# Altium PCB 外接陀螺仪模块(bmi160).PcbDoc
Units mil, origin at the board's own origin, x right, y up, seen from the top; angles counter-clockwise.
Board outline 1026 x 1289 mil, 2 copper layers (Top Layer, Bottom Layer); 41 components, 28 nets, 138 pads, 67 vias.
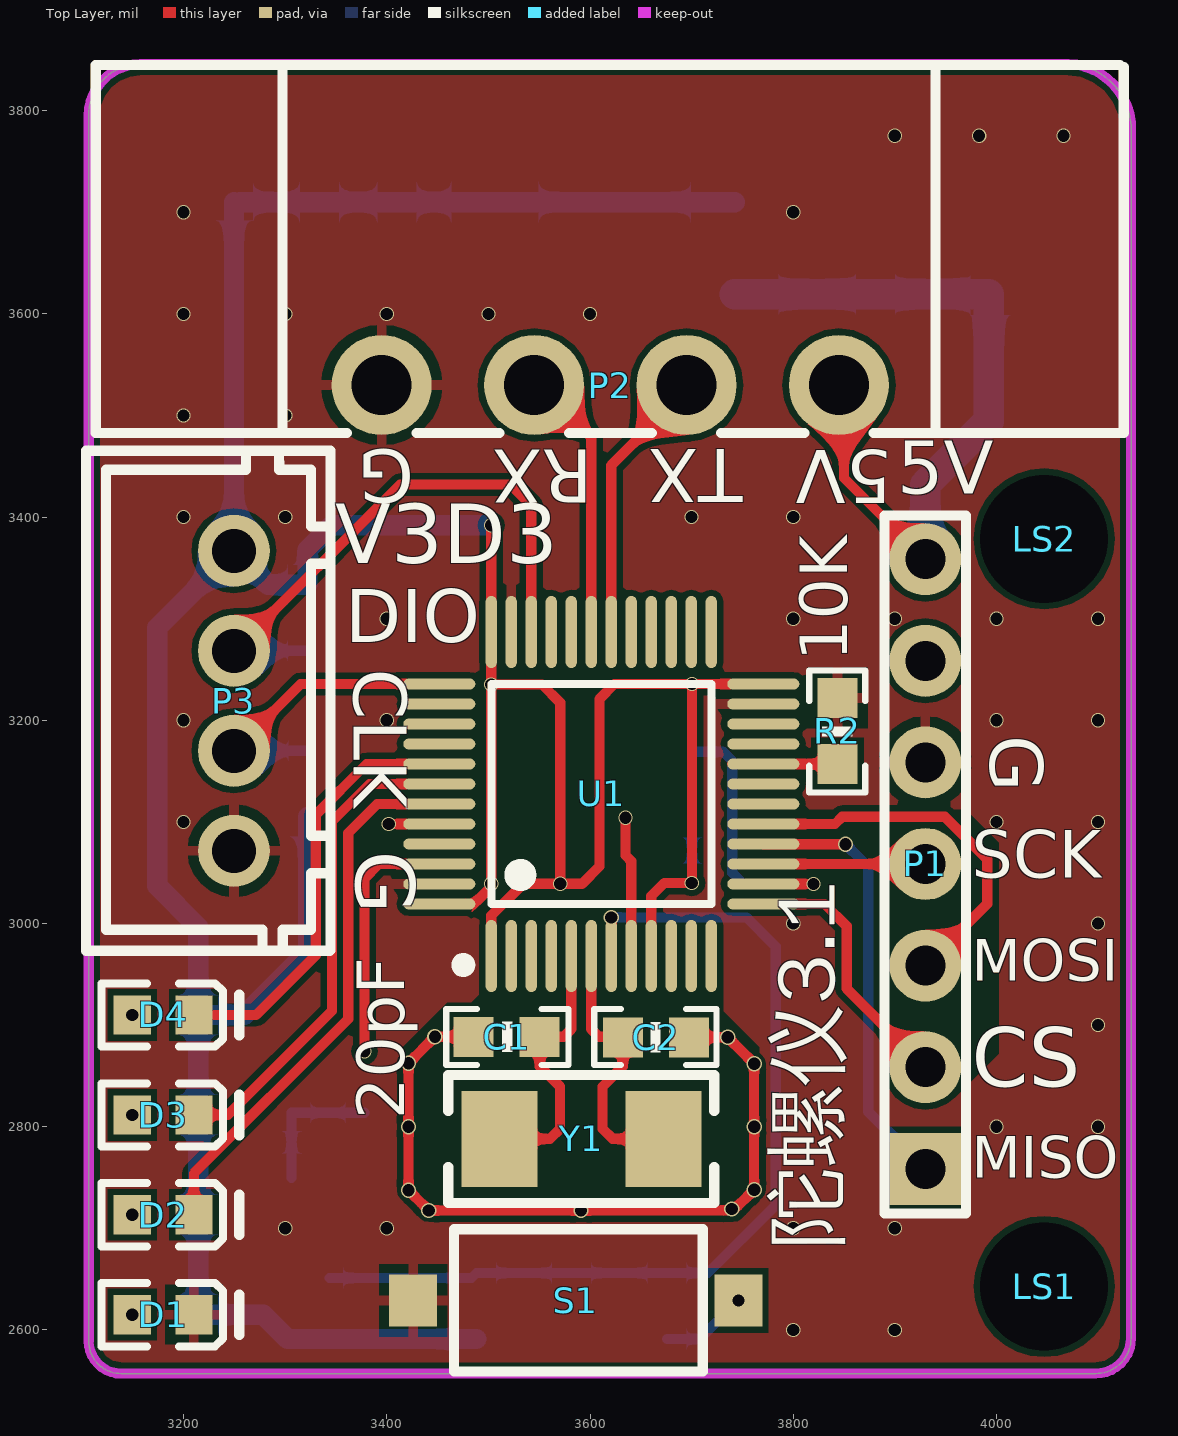
[diagram p0: Top Layer view]
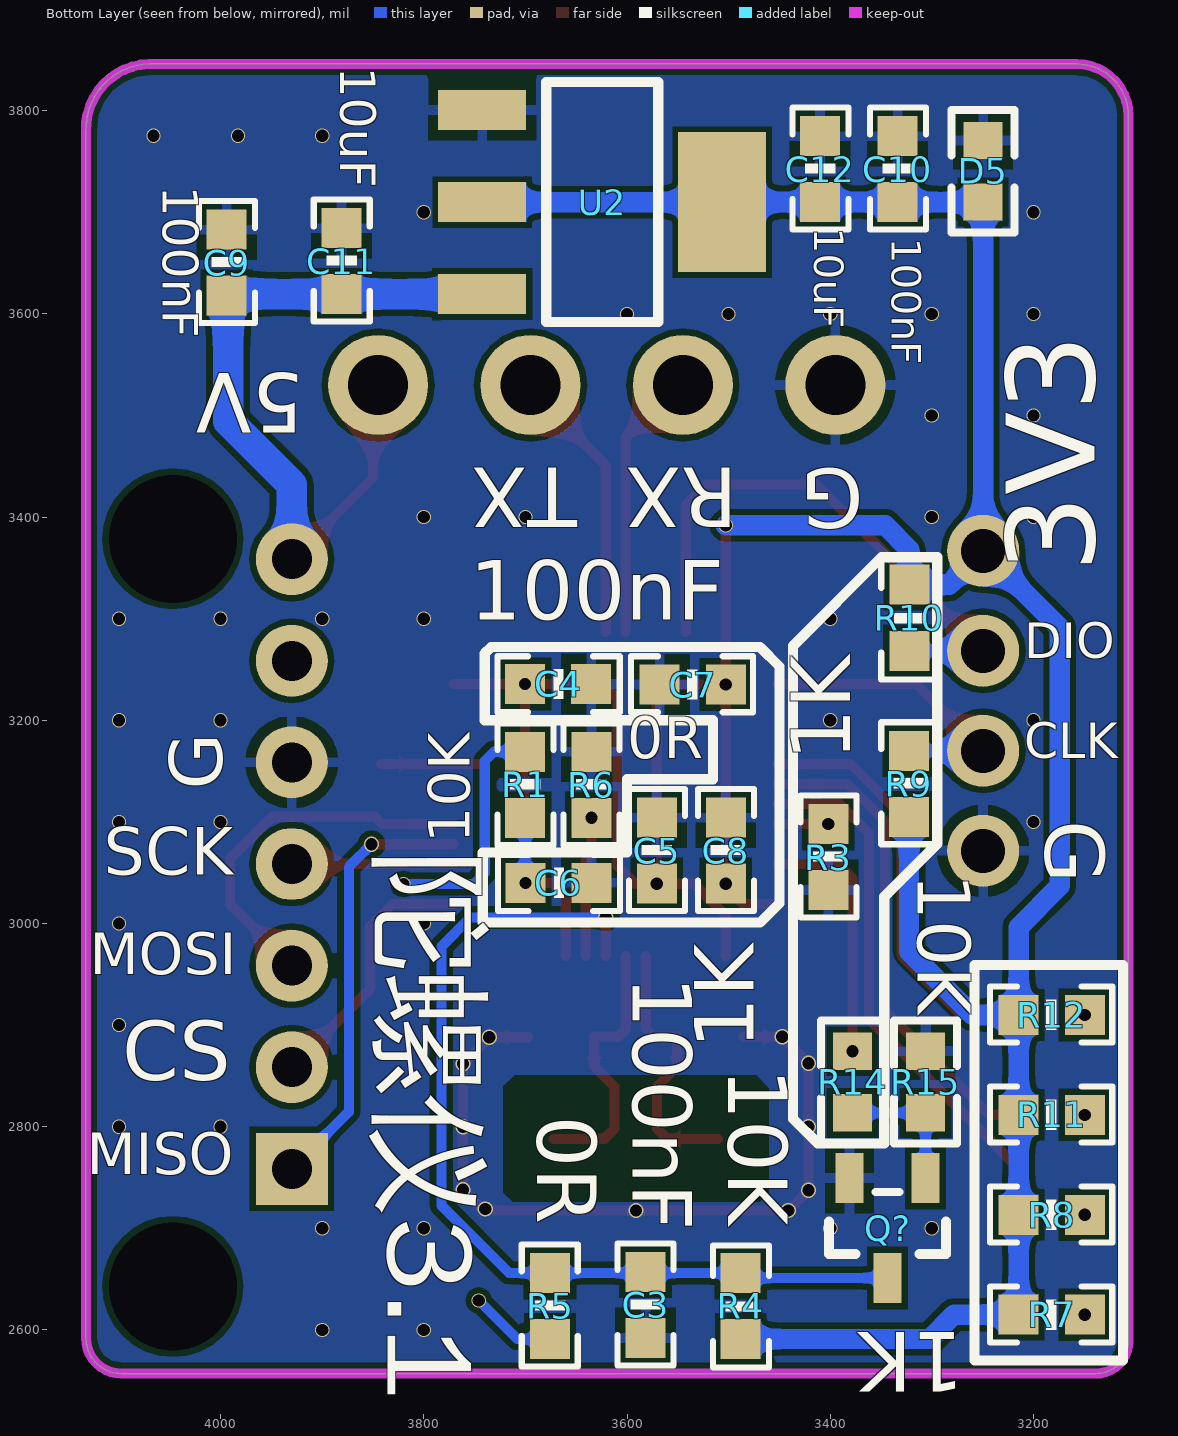
[diagram p1: Bottom Layer view, seen from below]
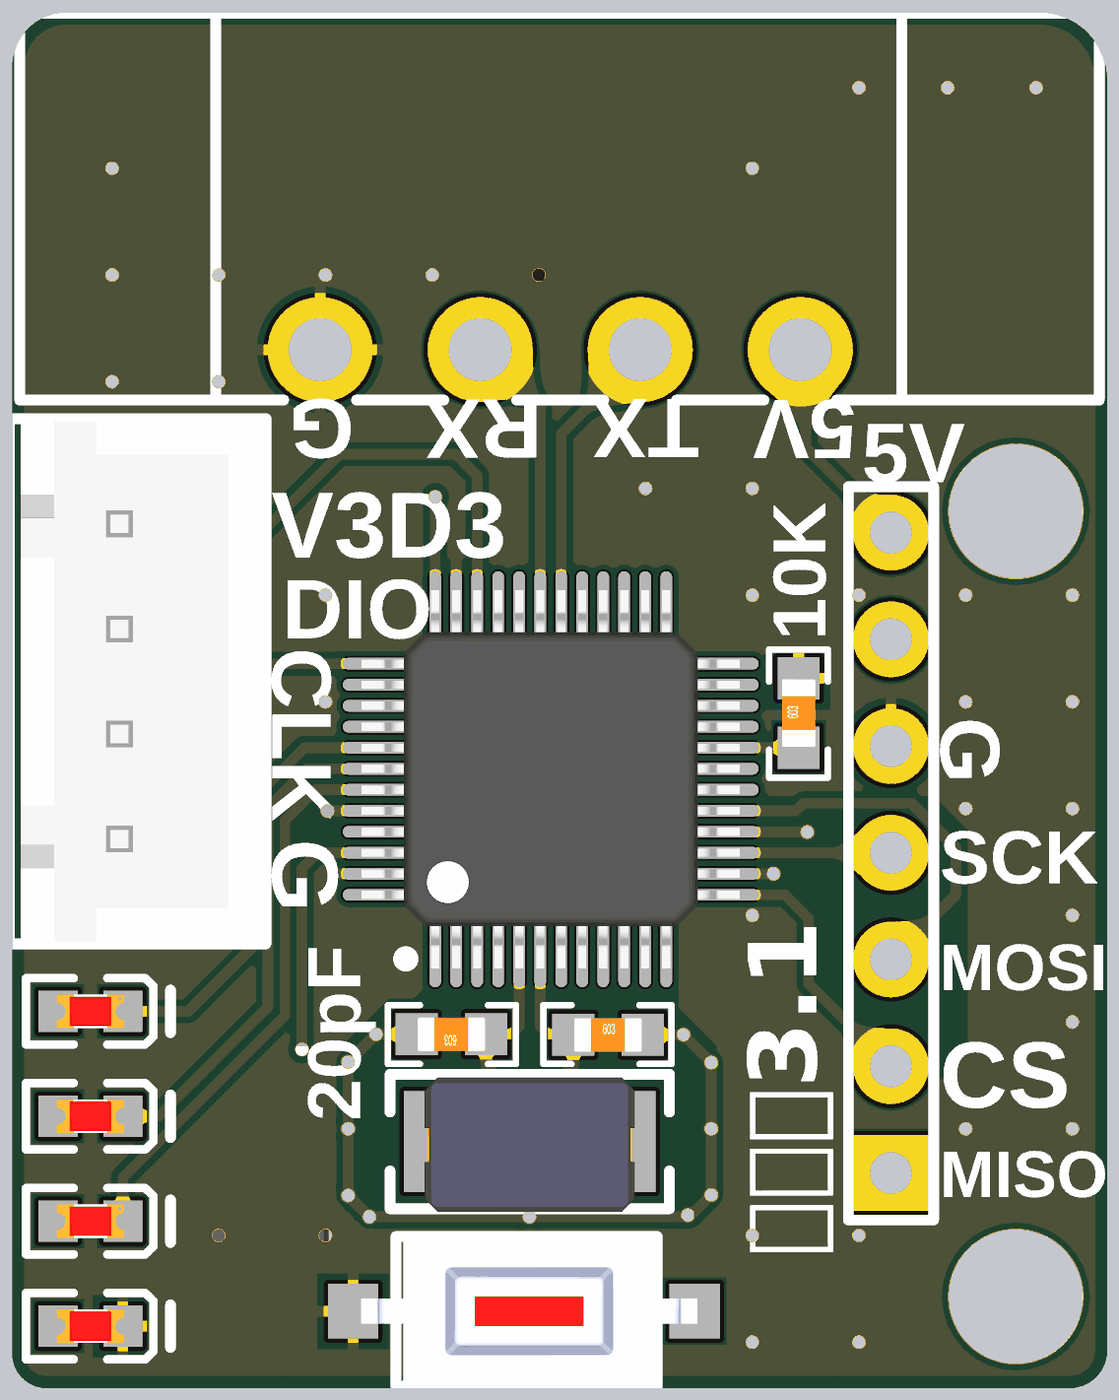
[diagram p2: 3D render of the assembled board from above, using the file's embedded part models]
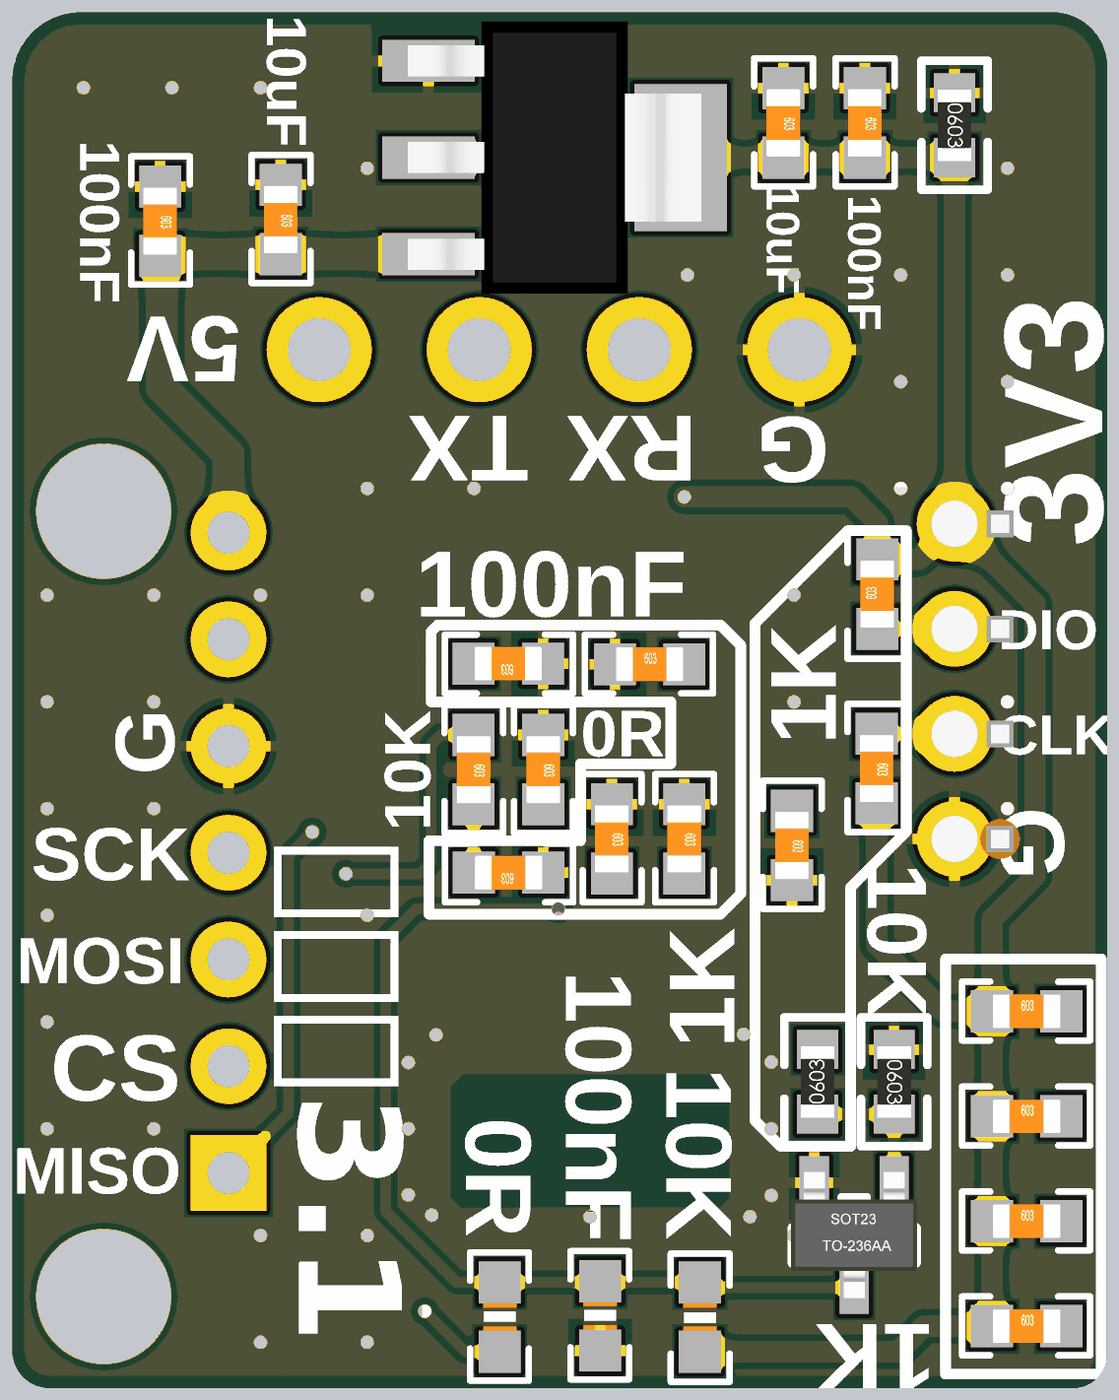
[diagram p3: 3D render of the assembled board from below, using the file's embedded part models]

## Layer stack, top to bottom
Top Solder: solder mask 0.4, Solder Resist, Dk 3.5
Top Layer: signal copper 1.4
Dielectric 1: dielectric 12.6, FR-4, Dk 4.8
Bottom Layer: signal copper 1.4
Bottom Solder: solder mask 0.4, Solder Resist, Dk 3.5

## Board outline
3106.55,2589 ccw(c3138.54,2589) 3138.54,2557.01 4097.55,2557.01 ccw(c4097.55,2592.01) 4132.55,2592.01 4132.55,3780.01 ccw(c4068.55,3782.01) 4070.55,3846.01 3157.55,3846.01 ccw(c3157.55,3795.01) 3106.55,3795.01

## Design rules (kind name [scope] priority, off if disabled: settings)
Clearance [All] p1: gap=6 ignorepadtopadclearanceinfootprint=FALSE
ComponentClearance [All] p1: gap=-10 collisioncheckmode=3 verticalgap=10 showdistances=FALSE
MinimumSolderMaskSliver [All] p1: minsoldermaskwidth=2
PolygonConnect [All] p1: connectstyle=Relief reliefconductorwidth=10 reliefentries=4 polygonreliefangle="90 Angle" airgapwidth=10
RoutingVias [All] p1: holewidth=28 width=50 viastyle="Through Hole" minholewidth=28 minwidth=50 maxholewidth=28 maxwidth=50
SolderMaskExpansion [All] p1: expansion=4
Width [All] p1: maxlimit=200 minlimit=6 preferedwidth=10
28 further rules are at their usual default settings.

## Components (designator, comment, footprint, x,y, rotation, side; value= is the part's Value field where it differs from the comment)
C1 "22pF" 0603(偏大) 3518.01,2888.5 r180 top
C2 "22pF" 0603(偏大) 3664.82,2888 r0 top
C3 "100nF" 0603(偏大) 3581.74,2624.62 r270 bottom
C4 "100nF" 0603(偏大) 3667.8,3235.74 r0 bottom
C5 "100nF" 0603(偏大) 3570.75,3071.69 r270 bottom
C6 "100nF" 0603(偏大) 3667.55,3040 r0 bottom
C7 "100nF" 0603(偏大) 3535.33,3235.24 r180 bottom
C8 "100nF" 0603(偏大) 3502.83,3071.69 r270 bottom
C9 "104/0603/16V" 0603(偏大) 3994,3650.5 r270 bottom
C10 "104/0603/16V" 0603(偏大) 3333.66,3742.5 r270 bottom
C11 "10uF" 0603(偏大) 3881,3651.95 r270 bottom
C12 "10uF" 0603(偏大) 3410,3742.5 r270 bottom
D1 "红灯 0603" 0603_LED_S1 3179.78,2615 r180 top
D2 "绿灯 0603" 0603_LED_S1 3179.78,2713.33 r180 top
D3 "蓝灯 0603" 0603_LED_S1 3179.78,2811.67 r180 top
D4 "绿灯 0603" 0603_LED_S1 3179.78,2910 r180 top
D5 "AU3321D5" 0603_R 3249.55,3740.32 r270 bottom
LS1 "螺丝" 螺丝（3.2mm） 4047,2642.75 r0 top
LS2 "螺丝" 螺丝（3.2mm） 4047,3378.57 r0 top
P1 "bmi160陀螺仪模块7pin" BMI160陀螺仪模块2 3720,2973.74 r180 top
P2 "3.81端子 4P" 绿色端子4PINPW 3832.31,3657.96 r180 top
P3 "4排针" 4P-P2.50_HX25003-4A 3254.55,3071.57 r270 top
Q? "NPN" SOT-23(SM712-N) 3306.2,2749.5 r90 bottom
R1 "10K" 0603(偏大) 3700.3,3136.5 r270 bottom
R2 "10K" 0603(偏大) 3843.55,3189.5 r90 top
R3 "10K" 0603(偏大) 3401.94,3065.44 r270 bottom
R4 "10K" 0603(偏大) 3488.19,2623.5 r90 bottom
R5 "0R" 0603(偏大) 3675.8,2623.5 r270 bottom
R6 "0R" 0603(偏大) 3635.05,3136.5 r270 bottom
R7 "1K" 0603(偏大) 3181.97,2615 r180 bottom
R8 "1K" 0603(偏大) 3181.97,2713.33 r180 bottom
R9 "1KR/1%/0603" 0603(偏大) 3322.5,3137.5 r270 bottom
R10 "1KR/1%/0603" 0603(偏大) 3322,3300.92 r90 bottom
R11 "1K" 0603(偏大) 3181.97,2811.67 r180 bottom
R12 "1K" 0603(偏大) 3181.97,2910 r180 bottom
R14 "Res2" 0603_R 3378,2844 r90 bottom value=1K
R15 "Res2" 0603_R 3306.2,2844 r270 bottom value=10K
S1 "微动开关2P" switch 3416,2629 r180 top
U1 "STM32F103C8T6" LQFP-48_7x7x05P 3611.1,3127.47 r0 top
U2 "LM1117-3.3" SOT-223 3624.41,3710 r0 bottom
Y1 "8MHz ±20ppm 20pF" SMD-5032_2P 3591.41,2788 r180 top

## Footprints (in the part's own frame and the unit in brackets; to place one, negate y for a bottom-side part, rotate by r counter-clockwise, add the part's x,y. Pads: shape width x height; smd on the part's side, far side on the other; paste and mask are expansions set on the pad)
4P-P2.50_HX25003-4A [mm]
  round 1.8 hole 1.1: 1(-7.5,-0.127) 2(-5,-0.127) 3(-2.5,-0.127) 4(0,-0.127)
  silkscreen extent -10,-3.83 2.5,2.28, body extent -9.95,-3.56 2.45,2.19, height 7
0603(偏大) [mm]
  rect 1x1 smd: 1(-0.825,0) 2(0.826,0)
  silkscreen extent -1.54,-0.69 1.51,0.71, body extent -0.8,-0.4 0.8,0.4, height 0.3
0603_LED_S1 [mm]
  rect 0.93x0.98 smd: A(0.77,0) K(-0.77,0)
  silkscreen extent -1.91,-0.79 1.53,0.79, body extent -0.8,-0.4 0.8,0.4, height 0.6
0603_R [mm]
  rect 0.93x0.98 smd: 1(-0.77,0) 2(0.77,0)
  silkscreen extent -1.54,-0.79 1.54,0.79, body extent -0.85,-0.4 0.85,0.4, height 0.56
BMI160陀螺仪模块2 [mm]
  rect 1.8x1.8 hole 1: 1(-5.334,5.465)
  round 1.8 hole 1: 2(-5.334,2.925) 3(-5.334,0.385) 4(-5.334,-2.155) 5(-5.334,-4.695) 6(-5.334,-7.235) 7(-5.334,-9.775)
  silkscreen extent -6.35,-10.87 -4.32,6.58
LQFP-48_7x7x05P [mm]
  oval 0.28x1.8 smd mask+0.051: 1(-2.75,-4.05) 2(-2.25,-4.05) 3(-1.75,-4.05) 4(-1.25,-4.05) 5(-0.75,-4.05) 6(-0.25,-4.05) 7(0.25,-4.05) 8(0.75,-4.05) 9(1.25,-4.05) 10(1.75,-4.05) 11(2.25,-4.05) 12(2.75,-4.05) 25(2.75,4.05) 26(2.25,4.05) 27(1.75,4.05) 28(1.25,4.05) 29(0.75,4.05) 30(0.25,4.05) 31(-0.25,4.05) 32(-0.75,4.05) 33(-1.25,4.05) 34(-1.75,4.05) 35(-2.25,4.05) 36(-2.75,4.05)
  oval 1.8x0.28 smd mask+0.051: 13(4.05,-2.75) 14(4.05,-2.25) 15(4.05,-1.75) 16(4.05,-1.25) 17(4.05,-0.75) 18(4.05,-0.25) 19(4.05,0.25) 20(4.05,0.75) 21(4.05,1.25) 22(4.05,1.75) 23(4.05,2.25) 24(4.05,2.75) 37(-4.05,2.75) 38(-4.05,2.25) 39(-4.05,1.75) 40(-4.05,1.25) 41(-4.05,0.75) 42(-4.05,0.25) 43(-4.05,-0.25) 44(-4.05,-0.75) 45(-4.05,-1.25) 46(-4.05,-1.75) 47(-4.05,-2.25) 48(-4.05,-2.75)
  silkscreen extent -3.6,-4.42 2.75,2.75, body extent -4.5,-4.5 4.5,4.5, height 1.6
SMD-5032_2P [mm]
  rect 1.9x2.4 smd: 1(-2.05,0) 2(2.05,0)
  silkscreen extent -3.32,-1.6 3.32,1.6, body extent -2.5,-1.52 2.5,1.68, height 1.3
SOT-23(SM712-N) [mm]
  rect 1.25x0.7 smd: 1(0,0) 2(0,1.9) 3(-2.5,0.95)
  silkscreen extent -1.9,-0.51 -0.35,2.41, body extent -2.75,-0.55 0.25,2.45, height 1.3
SOT-223 [mm]
  rect 2.2x1 smd: 1(3,-2.3) 2(3,0) 3(3,2.3)
  rect 2.2x3.5 smd: 2(-3,0)
  silkscreen extent -1.4,-3 1.4,3, body extent -3.49,-3.24 3.49,3.24, height 1.64
switch [mm]
  rect 1.2x1.3 smd: 1(-0.254,0) 2(-8.382,0)
  silkscreen extent -7.49,-1.78 -1.27,1.78, body extent -8.44,-1.8 -0.44,1.8, height 2.4
绿色端子4PINPW [mm]
  round 2.5 hole 1.5: 1(-0.322,3.25) 2(3.488,3.25) 3(7.298,3.25) 4(11.108,3.25)
  silkscreen extent -7.44,-4.75 18.26,4.45
螺丝（3.2mm） [mm]
  round 0 hole 3.2: 1(0,0)

## Part data
C1 C2 C3 C4 C5 C6 C7 C8 C11 C12: library part C
C9 C10: library part CAP, =104/0603/16V
D1: library part "0603 红灯", "发光二极管"
D2 D4: library part "0603 绿灯", "发光二极管"
D3: library part "0603 蓝灯", "发光二极管"
D5: library part PESD5V0V1BB
P2 P3: library part "Header 4", "Header, 4-Pin", LatestRevisionDate=17-Jul-2002, LatestRevisionNote="Re-released for DXP Platform.", Publisher="Altium Limited"
Q?: "NPN Bipolar Transistor", Code_JEDEC=TO-226-AA, LatestRevisionDate=17-Jul-2002, LatestRevisionNote="Re-released for DXP Platform.", PackageDescription="TO, Flat Index; 3 In-Line, Axial Leads; Body Dia. 4.8mm; Leads 0.55 x 0.51 mm (max)", PackageReference=TO-226-AA, Published=8-Jun-2000, Publisher="Altium Limited"
R1 R2 R3 R4 R5 R6 R7 R8 R9 R10 R11 R12: library part R
R14 R15: "Resistor"
Y1: library part "SMD-5032_2P 8MHz 20ppm 20pF", "贴片晶振"

## Via types
v1: diameter 14, hole 12, Top Layer to Bottom Layer, tented both sides, 53 vias
v2: diameter 15, hole 12, Top Layer to Bottom Layer, tented both sides, 13 vias
v3: diameter 14/14 (per signal layer), hole 12, Top Layer to Bottom Layer, tented both sides, 1 vias

## Nets (pads, with @x,y where several pads share a name; then routed paths per layer and width w, separated by ;. In a path a pad name is that pad's centre, name@x,y a point inside that pad or via, vN(x,y) a via of type N, cw(c..) or ccw(c..) an arc to the next point about the centre after c; other vN are vias at no path point)
AGND: R6.2 U1.8 | length 138.3
  Top Layer w10: v1(3635.05,3104) 3635.05,3066.95 3640.63,3061.37 U1.8
CS(PA3): P1.2 U1.13 | length 262
  Top Layer w10: U1.13 3830.8,3019.2 3852.69,2997.31 3852.69,2935.88 P1.2
DGND: C1.2 C2.2 C3.2 C4.1 C5.1 C6.1 C7.1 C8.1 C9.1 C10.1 C11.1 C12.1 D1.K D5.1 P1.5 P2.4 P3.4 Q?.2 R2.2 R3.2 R6.1 R15.1 S1.1 U1.23 U1.35 U1.47 U2.1 | length 756
  Top Layer w10: C1.2 v2(3447.28,2888.5) v2(3421.28,2862.5) v2(3421.28,2737.51) v2(3441.28,2717.51) 3741.05,2717.51 v2(3761.55,2738.01) v2(3761.55,2862) v2(3735.55,2888) C2.2
  other v1: 3800,2600 3900,2600 3300,2700 3400,2700 3800,2700 3900,2700 4000,2800 4100,2800 4100,2900 3800,3000 4100,3000 3200,3100 4000,3100 4100,3100 3200,3200 3400,3200 4000,3200 4100,3200 3400,3300 3800,3300 3900,3300 4000,3300 4100,3300 3200,3400 3300,3400 3700,3400 3800,3400 3200,3500 3300,3500 3200,3600 3300,3600 3400,3600 3500,3600 3600,3600 3200,3700 3800,3700 3900,3775.43 3983,3775.43 4066,3775.43
  other v2: 3591.16,2717.51 3739.55,2719 3421.28,2800.01 3761.55,2800.01
LED_BLUE(PB6): D3.K U1.42 | length 485.6
  Top Layer w10: D3.K 3243.67,2811.67 3346,2914 3346,3100.37 3382.94,3137.31 U1.42
LED_GREEN(PB5): D4.K U1.41 | length 404.9
  Top Layer w10: 3230.1,2910 3271.37,2910 3330,2968.63 3330,3107 3380,3157 U1.41
LED_GREEN(PB7): D2.K U1.43 | length 540.1
  Top Layer w10: D2.K 3210.1,2754.1 3362,2906 3362,3089.06 3390.57,3117.63 U1.43
NetC1_1: C1.1 U1.5 Y1.2 | length 269
  Top Layer w10: Y1.2 3560.55,2788 3570.55,2798 3570.55,2839.34 3550.51,2859.38 C1.1 3574.05,2888.5 3581.57,2896.02 U1.5
NetC2_1: C2.1 U1.6 Y1.1 | length 269
  Top Layer w10: U1.6 3601.26,2896.02 3608.78,2888.5 3632.32,2888.5 3632.32,2859.38 3612.28,2839.34 3612.28,2798 3622.28,2788 Y1.1
NetD1_A: D1.A R7.2
  other v1: 3149.47,2615
NetD2_A: D2.A R8.2
  other v1: 3149.47,2713.33
NetD3_A: D3.A R11.2
  other v1: 3149.47,2811.67
NetD4_A: D4.A R12.2
  other v1: 3149.47,2910
NetQ?_1: Q?.1 R14.1 R15.2 | length 136
  Bottom Layer w10: Q?.1 R15.2 R14.1
NetR2_1: R2.1 U1.20 | length 103
  Top Layer w10: U1.20@3739.69,3157 R2.1@3842.69,3157
NetR3_1: R3.1 U1.44 | length 49.7
  Top Layer w10: v1(3401.94,3097.94) U1.44
NetR5_2: R5.2 S1.2 | length 85.9
  Bottom Layer w10: R5.2 3708,2591 v1(3746,2629)
NRST: C3.1 Q?.3 R4.2 R5.1 U1.7 | length 935.1
  Top Layer w10: U1.7 3621,2968.08 v2@3621,3006
  Bottom Layer w10: Q?.3 3483.27,2651.08 R4.2 R5.1 3716,2656 3782.75,2722.75 3782.75,2977.25 3754,3006 v2(3620.94,3006)
SPI1_MISO(PA6): P1.1 U1.16 | length 433
  Top Layer w10: U1.16 3770.81,3078 v2(3851.55,3078)
  Bottom Layer w10: v2(3851.55,3078) 3873.81,3055.74 3873.81,2814.76 P1.1
SPI1_MOSI(PA7): P1.3 U1.17 | length 370.5
  Top Layer w10: U1.17 3841.12,3097.94 3848.18,3105.01 3949.23,3105.01 3990.9,3063.35 3990.9,3019.47 P1.3
SPI1_NSS(PA4): R1.1 U1.14 | length 287.5
  Top Layer w10: U1.14 v1(3820,3038.89)
  Bottom Layer w10: R1.1 3731,3169 3740,3160 3740,3050 3751.11,3038.89 v1(3820,3038.89)
SPI1_SCK(PA5): P1.4 U1.15 | length 159.5
  Top Layer w10: U1.15 P1.4
SWCLK: P3.3 R9.1 U1.37 | length 302.3
  Top Layer w10: P3.3 3315.29,3235.74 U1.37
  Bottom Layer w10: P3.3 R9.1
SWDIO: P3.2 R10.1 U1.34 | length 566.1
  Top Layer w10: P3.2 3413.12,3432 3522,3432 3542.2,3411.8 U1.34
  Bottom Layer w10: P3.2 R10.1
USART1_RX(PA10): P2.3 U1.31 | length 264.3
  Top Layer w10: P2.3@3550,3530 3601.26,3478.74 U1.31
USART1_TX(PA9): P2.2 U1.30 | length 275.8
  Top Layer w10: U1.30 3620.94,3450.94 P2.2@3700,3530
V3D3: C4.2 C5.2 C6.2 C7.2 C8.2 C10.2 C12.2 D5.2 P3.1 R1.2 R4.1 R7.1 R8.1 R9.2 R10.2 R11.1 R12.1 U1.1 U1.9 U1.24 U1.36 U1.48 U2.2 | length 4022.2
  Top Layer w10: U1.48 3485.77,3019.2 3502.83,3036.27 v1(3502.83,3039.19) v1(3502.83,3235.24) ; U1.1 3502.83,3007.83 3534.19,3039.19 v1(3570.75,3039.19) ; v1(3502.83,3392) U1.36 v1(3502.83,3235.24) ; U1.9 3660.31,3027.08 3673.23,3040 v1(3700.05,3040) 3700.3,3040.25 v1(3700.3,3235.74) ; U1.24 v1(3700.3,3235.74) ; v1(3502.83,3235.24) 3552.76,3235.24 3570.75,3217.25 v1(3570.75,3039.19) ; v1(3570.75,3039.19) 3592.19,3039.19 3609.19,3056.19 3609.19,3220.82 3624.11,3235.74 v1(3700.3,3235.74)
  Bottom Layer w10: v1(3700.05,3040) 3700.3,3040.25 R1.2
  Bottom Layer w20: D5.2 P3.1 ; D5.2@3254.93,3710 C10.2 C12.2 3506.29,3710 U2.2@3742.52,3710 ; R9.2 3322.5,2972.5 3260,2910 R12.1 ; R4.1 3302.26,2591 3278.26,2615 R7.1 R11.1 R12.1 ; v1(3502.83,3392) 3346,3392 3322,3368 R10.2 3282.97,3333.43 P3.1 ; R12.1 3214.47,2996.53 3174,3037 3174,3291.3 P3.1
VCC5V: C9.2 C11.2 P1.7 P2.1 U2.3 | length 723.3
  Top Layer w10: P2.1@3850,3530 3850,3438.57 P1.7
  Bottom Layer w30: U2.3 C11.2 3992.55,3619.45 3992.55,3494.55 3930,3432 P1.7@3930,3376.69
复位(PB9): R14.2 U1.46 | length 249.5
  Top Layer w10: v3(3378,2874.32) 3378,3044.2 3392.38,3058.57 U1.46
pads on no net: LS1.1 LS2.1 P1.6 U1.2 U1.3 U1.4 U1.10 U1.11 U1.12 U1.18 U1.19 U1.21 U1.22 U1.25 U1.26 U1.27 U1.28 U1.29 U1.32 U1.33 U1.38 U1.39 U1.40 U1.45

## Polygon pours and split planes (outlines as drawn)
DGND on Top Layer "Top Layer-DGND" (solid, remove dead copper, pour order 18): 3019,3940 2980,3901 2980,2541 4178,2541 4210,2509 4220,2519 4220,3915
DGND on Bottom Layer "Bottom Layer-DGND" (solid, remove dead copper, pour order 20): 3055,3898 3055,2524 3120,2459 3192,2531 4282,2531 4282,3776 4128,3930

## Keep-outs
Keep-Out Layer:
  the board outline again, w10

## Other copper
Top Layer:
  pour cut-out: 3731.1,2938.1 3731.1,2913.59 3722.56,2922.13 3722.56,2927
  pour cut-out: 3491.09,2938.1 3491.09,2930.05 3483.04,2922 3499.15,2922 3499.15,2926.51 3499.64,2927
  pour cut-out: 3970,3111.79 3813.89,3111.79 3811.62,3114.06 3811.62,3019.2 3852.69,3019.2 3890.9,2981 3890.9,2897.68 3959.55,2829.02 4002.11,2871.58 4002.11,3079.68
  pour cut-out: 3970,3111.79
  pour cut-out: 3902.05,3109.16
  pour cut-out: 3722.69,2922 3459.64,2922 3414.79,2877.15 3414.79,2744 3441.28,2717.51 3741.05,2717.51 3766.55,2743.01 3766.55,2878.14
  pour cut-out: 3460.55,2849.89
  pour cut-out: 3574.93,2929 3568.02,2922.09 3568.02,2922 3575.08,2922
  pour cut-out: 3614.75,2922.14 3607.84,2929.06 3607.75,2929.06 3607.75,2922
  pour cut-out: 3581.57,3004.58 3601.26,3004.58 3601.26,2923 3581.57,2923
Bottom Layer:
  pour cut-out: 3460.55,2838 3460.55,2735.36 3469.57,2726.33 3712.55,2726.01 3721.71,2735.15 3721.71,2839.84 3710.7,2850.85 3473.55,2850.99

## Silkscreen, mask and mechanical layers (free items; w line width, h text height)
Top Overlay:
  text "TX" at 3750.48,3483.88 h90 r180
  text "G" at 3426.95,3483.34 h90 r180
  text "RX" at 3602.9,3483.34 h90 r180
  text "5V" at 3897.48,3482.8 h90 r180
  text "5V" at 3902.52,3405.77 h90
  text "V3D3" at 3349.19,3335.26 h100
  text "DIO" at 3359.19,3259.6 h90
  text "10K" at 3868.57,3258 h80 r90
  text "CLK" at 3350.2,3250.76 h90 r270
  text "G" at 3976.66,3185.52 h90 r270
  text "G" at 3350.41,3071.5 h100 r270
  text "SCK" at 3975.58,3030 h80
  text "MOSI" at 3975.58,2930 h70
  text "CS" at 3975.58,2820 h100
  text "20pF" at 3432.55,2807.26 h80 r90
  text "MISO" at 3975.58,2736.15 h70
  text "陀螺仪3.1" at 3860,2680 h100 r90
Bottom Overlay:
  lines w10: 3112,2570 3258,2570 3258,2959 3112,2959 3112,2570 ; 3294.69,3078.47 3346.9,3026.26 3346.9,2783.57 3412.43,2783.57 3436.52,2807.66 3436.52,3273.48 3349.58,3360.42 3294.69,3360.42 3294.69,3078.47 ; 3450,3020 3469,3001 3742,3001 3742,3070 3600,3070 3600,3142 3515.5,3142 3515.5,3200 3539.46,3200 3610.64,3200 3740,3200 3740,3239.16 3740,3265.89 3733.89,3272 3484.11,3272 3469,3272 3450,3253 3450,3187.64 3450,3122.91 3450,3079.55 3450,3020
  text "10uF" at 3894,3843.27 h60 r90
  text "100nF" at 4069,3726 h60 r90
  text "10uF" at 3425.53,3684.74 h50 r90
  text "100nF" at 3349.19,3675 h50 r90
  text "5V" at 3918,3561 h100 r180
  text "RX" at 3491,3468 h100 r180
  text "TX" at 3649,3468 h100 r180
  text "G" at 3367,3466.8 h100 r180
  text "3V3" at 3111,3345 h150 r270
  text "100nF" at 3754.94,3280 h100
  text "DIO" at 3209,3249.22 h60
  text "1K" at 3360.97,3160 h100 r270
  text "CLK" at 3209,3150.77 h60
  text "0R" at 3600,3149 h70
  text "G" at 3981,3131.63 h90 r270
  text "G" at 3207.8,3101.5 h100 r90
  text "10K" at 3741,3079 h70 r270
  text "陀螺仪3.1" at 3864,3071 h150 r90
  text "10K" at 3331,3049 h90 r90
  text "SCK" at 4115,3032.97 h80
  text "100nF" at 3613.58,2948 h100 r90
  text "MOSI" at 4129,2936.15 h70
  text "1K" at 3456,2876 h100 r270
  text "10K" at 3519.53,2857.44 h100 r90
  text "CS" at 4097,2826.57 h100
  text "0R" at 3707.64,2810.64 h100 r90
  text "MISO" at 4132,2739.37 h70
  text "1K" at 3268,2617 h100 r180